# EAGLE board itrope-serial-vSS (EAGLE 7.2.0)
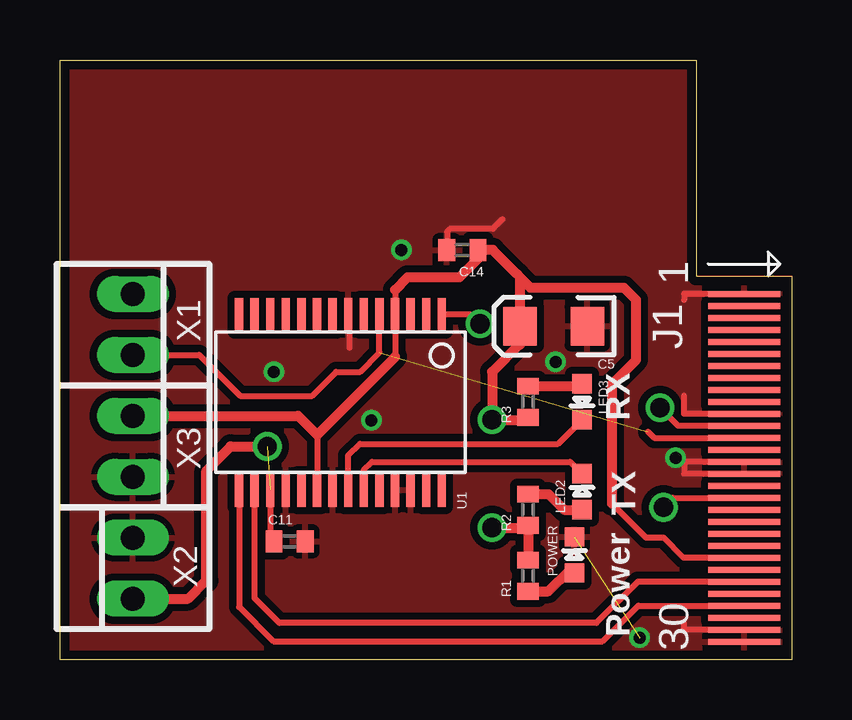
[diagram p0: board, top side]
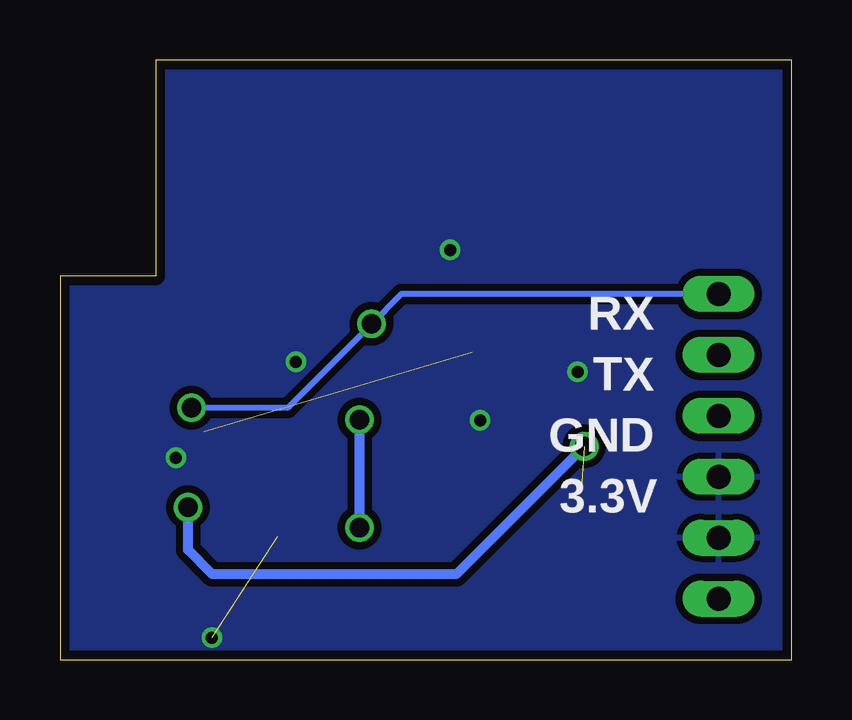
[diagram p1: board, bottom side, seen from below]

Size 30.48 x 25 mm. Coordinates in mm from the lower left corner, seen from the top.
Outline: 0,25 26.5,25 26.5,16 30.48,16 30.48,0 0,0 0,25
Copper layers (1*16): Top 0.0356mm / dielectric 1.5011mm / Bottom 0.0356mm
Design rules "LaenPCBOrder": minimum track width 6mil, minimum drill 13mil, track to track 6mil, track to pad 6mil, pad to pad 6mil, via to via 6mil, smd to smd 6mil, copper to edge 15mil, drill to drill 6mil, minimum pad ring 7mil, minimum via ring 7mil, stop-mask expansion 3mil, vias tented up to drill 0mil, thermal gap 10mil
Net classes: 1 vcc: width 0.203 mm

## Footprints (pad centres in the part's own frame; a part is rotated, then mirrored left to right if it is on the bottom)
EIA3216 = smd 1.4 x 1.6: A 1.4,0; C -1.4,0
C0402 = smd 0.7 x 0.9: 1 -0.65,0; 2 0.65,0
30PINEDGE = smd 0.25 x 3: P$1 7.25,1.5; P$2 6.75,1.5; P$3 6.25,1.5; P$4 5.75,1.5; P$5 5.25,1.5; P$6 4.75,1.5; P$7 4.25,1.5; P$8 3.75,1.5; P$9 3.25,1.5; P$10 2.75,1.5; P$11 2.25,1.5; P$12 1.75,1.5; P$13 1.25,1.5; P$14 0.75,1.5; P$15 0.25,1.5; P$16 -0.25,1.5; P$17 -0.75,1.5; P$18 -1.25,1.5; P$19 -1.75,1.5; P$20 -2.25,1.5; P$21 -2.75,1.5; P$22 -3.25,1.5; P$23 -3.75,1.5; P$24 -4.25,1.5; P$25 -4.75,1.5; P$26 -5.25,1.5; P$27 -5.75,1.5; P$28 -6.25,1.5; P$29 -6.75,1.5; P$30 -7.25,1.5
LED-0603 = smd 0.8 x 0.8: A 0,-0.75; C 0,0.75
SSOP28DB = smd 0.348 x 1.397: 1 -4.225,-3.656; 2 -3.575,-3.656; 3 -2.925,-3.656; 4 -2.275,-3.656; 5 -1.625,-3.656; 6 -0.975,-3.656; 7 -0.325,-3.656; 8 0.325,-3.656; 9 0.975,-3.656; 10 1.625,-3.656; 11 2.275,-3.656; 12 2.925,-3.656; 13 3.575,-3.656; 14 4.225,-3.656; 15 4.225,3.656; 16 3.575,3.656; 17 2.925,3.656; 18 2.275,3.656; 19 1.625,3.656; 20 0.975,3.656; 21 0.325,3.656; 22 -0.325,3.656; 23 -0.975,3.656; 24 -1.625,3.656; 25 -2.275,3.656; 26 -2.925,3.656; 27 -3.575,3.656; 28 -4.225,3.656
22-23-2021 = drill 1 long: 1 -1.27,0; 2 1.27,0

## Placement (x,y rotation side)
C5  10uF  [EIA3216]  20.57,13.9 180 top
C11  0.1uF  [C0402]  9.57,4.93 0 top
C14  0.1uF  [C0402]  16.76,17.07 180 top
J1  JAE-IPOD-EDGECARD  [30PINEDGE]  30,8 90 top
LED2  Red  [LED-0603]  21.75,7 0 top
LED3  Green  [LED-0603]  21.75,10.75 180 top
POWER  Red  [LED-0603]  21.43,4.37 0 top
R1  330  [C0402]  19.5,3.5 90 top
R2  1K  [C0402]  19.5,6.25 90 top
R3  1K  [C0402]  19.5,10.75 90 top
U1  FT232RL-BASICSSOP  [SSOP28DB]  11.68,10.72 180 top
U$9  CREATIVE_COMMONS  [CREATIVE_COMMONS]  -9.18,-27.14 0 top  (outside the outline)
X1  22-23-2021  [22-23-2021]  3.04,13.97 270 top
X2  22-23-2021  [22-23-2021]  3.04,3.81 90 top
X3  22-23-2021  [22-23-2021]  3.04,8.89 270 top

## Library data of the parts
C5 C11 C14 LED2 LED3 POWER R1-R3 U1 U$9 = SparkFun
J1 = con-jae-IPOD-edgecard
X1-X3 = con-molex; MF: MOLEX; MPN: 22-23-2021; OC_FARNELL: 1462926; OC_NEWARK: 25C3832

## Nets
5V [vcc]: C5.A C14.1 J1.P$23 R1.2 R2.1 R3.1 U1.4 U1.20 X3.1
+3V3: C11.1 J1.P$18 U1.17 X2.1
D+: J1.P$27 U1.15
D-: J1.P$25 U1.16
GND [vcc]: C5.C C11.2 C14.2 J1.P$1 J1.P$11 J1.P$15 J1.P$16 J1.P$29 J1.P$30 POWER.C U1.7 U1.18 U1.21 U1.25 U1.26 X2.2 X3.2
N$1: POWER.A R1.1
N$3: LED2.A R2.2
N$4: LED3.A R3.2
RXD: J1.P$13 U1.5 X1.2
RXLED: LED3.C U1.22
TXD: J1.P$12 U1.1 X1.1
TXLED: LED2.C U1.23

## Tracks (layer width: path | path; a pad name or v marks a point on that pad's centre or on a via)
5V  (via drill 0.8)
  Top 0.254: C14.1 17.41,16.71 | 19.3,10.09 R3.1 | 19.17,15.93 19.05,16.05 | 19.17,13.13 C5.A | 13.96,12.62 U1.4 13.96,15.41 | 10.71,9.37 U1.20 | J1.P$23 25.98,4.25 25.15,5.08 24.42,5.08 23,6.5
  Top 0.406: 13.96,15.41 14.48,15.93 16.64,15.93 17.41,16.71 | C5.A 19.17,15.93 19.61,15.5 23.5,15.5 24,15 24,12.5 23,11.5 23,6.5 | 19.05,16.05 18.03,17.07 C14.1 | 13.96,12.62 10.71,9.37 9.92,10.16 X3.1 | 19.35,4 R1.2 R2.1 19.4,5.5 v18,5.5 | R3.1 19.4,10 v18,10 18,12 19.13,13.13 19.17,13.13
  Bottom 0.406: v18,5.5 v18,10
+3V3  (via drill 0.8)  (1 unrouted)
  Top 0.254: U1.17 8.76,5.08 C11.1 | v25.15,6.35 25.55,6.75 J1.P$18
  Top 0.406: X2.1 5.33,2.54 6.1,3.3 6.1,7.87 7.11,8.89 v8.64,8.89
  Bottom 0.406: v8.64,8.89 13.97,3.56 24.13,3.56 25.15,4.57 v25.15,6.35
D+
  Top 0.254: U1.15 7.46,2.19 8.89,0.76 22.61,0.76 24.09,2.25 J1.P$27
D-
  Top 0.254: J1.P$25 24.08,3.25 22.35,1.52 9.14,1.52 8.11,2.56 U1.16
GND  (via drill 0.5)  (1 unrouted)
  Top 0.254: C14.2 16.13,17.09 16.13,17.84 16.26,17.96 18.03,17.96 18.43,18.36 | U1.7 12.06,14.32 12.06,13 | J1.P$29 26,1.25 26,1.5 | J1.P$16 26,7.75 26,8.25 J1.P$15 | J1.P$1 26,15.25 26,15 | J1.P$11 26,10.25 26,11
  other vias: 14.22,17.07 8.91,11.99 12.97,9.97 25.65,8.41 24.15,0.91 20.65,12.41
  pour Top (isolate 0.3): 0,0 0,25.4 30.48,25.4 30.48,0
  pour Bottom (isolate 0.305): 0,0 0,25.4 30.48,25.4 30.48,0
N$1
  Top 0.406: R1.1 20.35,2.85 21.25,3.75 POWER.A
N$3
  Top 0.406: R2.2 20.35,6.9 21,6.25 LED2.A
N$4
  Top 0.406: R3.2 21.65,11.4 LED3.A
RXD  (1 unrouted)
  Top 0.254: U1.5 13.31,12.81 12.5,12 11.5,12 10.5,11 7.5,11 5.8,12.7 X1.2 | 24.5,9.5 24.75,9.25 J1.P$13
RXLED
  Top 0.254: U1.22 12.01,8.51 12.5,9 20.75,9 LED3.C
TXD  (via drill 0.8)
  Top 0.254: J1.P$12 25.75,9.75 v25,10.5 | v17.5,14 17.12,14.38 U1.1
  Bottom 0.254: X1.1 16.26,15.24 v17.5,14 21,10.5 v25,10.5
TXLED
  Top 0.254: U1.23 12.66,7.91 13,8.25 21.25,8.25 LED2.C

## Text on the board
tPlace: RX | TX | Power
bPlace: RX | TX | GND | 3.3V